# Altium PCB Din24x.PcbDoc
Units mil, origin at the board's own origin, x right, y up, seen from the top; angles counter-clockwise.
Board outline 2913.39 x 1181.1 mil, 2 copper layers (Top Layer, Bottom Layer); 21 components, 34 nets, 164 pads, 47 vias.
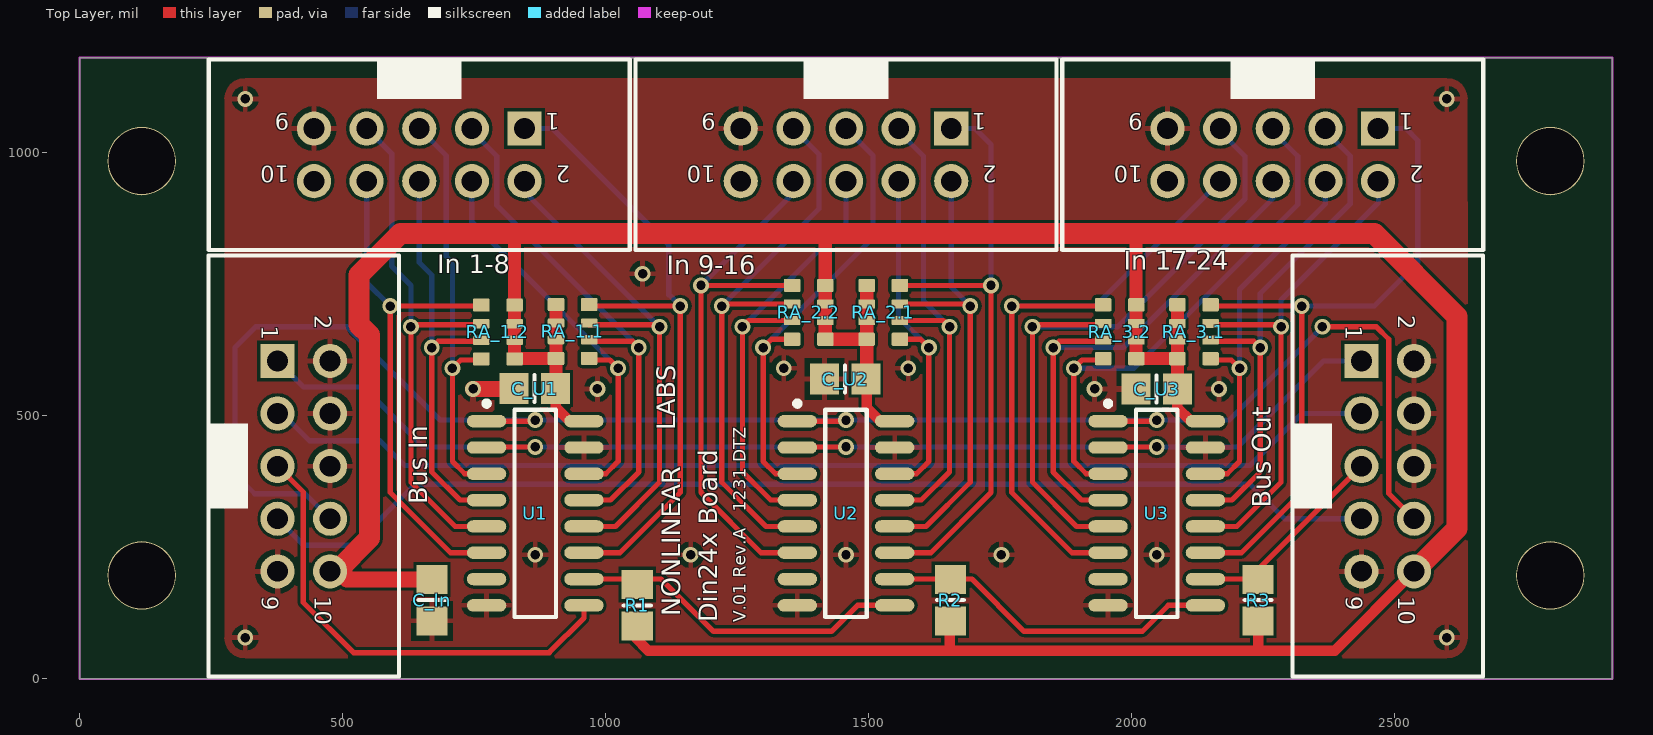
[diagram p0: Top Layer view]
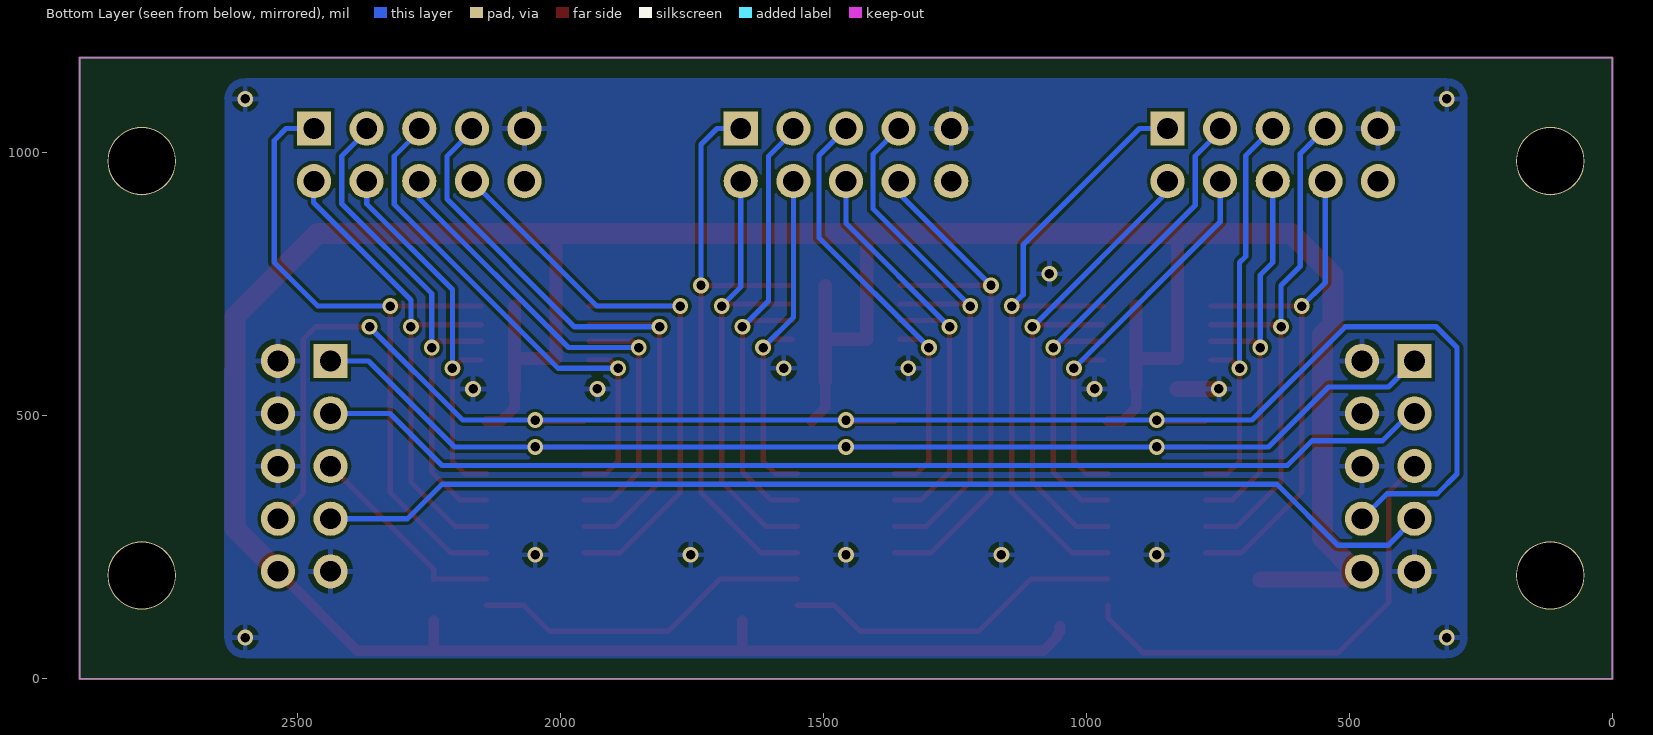
[diagram p1: Bottom Layer view, seen from below]

## Layer stack, top to bottom
Top Layer: signal copper 1.4
Dielectric: dielectric 12.6, FR-4, Dk 4.8
Bottom Layer: signal copper 1.4

## Board outline
0,0 0,1181.1 2913.39,1181.1 2913.39,0 1968.5,0

## Design rules (kind name [scope] priority, off if disabled: settings)
Clearance [All] p1: gap=6
ComponentClearance [All] p1 off: gap=10 collisioncheckmode=3 verticalgap=10 showdistances=FALSE
HoleSize [All] p1: absolutevalues=TRUE maxlimit=196.85 minlimit=1 maxpercent=80.000 minpercent=20.000
MinimumSolderMaskSliver [All] p1: minsoldermaskwidth=6
PolygonConnect [All] p1: connectstyle=Relief reliefconductorwidth=10 reliefentries=4 polygonreliefangle="90 Angle" airgapwidth=10
RoutingVias [All] p1: holewidth=28 width=50 viastyle="Through Hole" minholewidth=28 minwidth=50 maxholewidth=28 maxwidth=50
SilkToSilkClearance [All] p1 off: silktosilkclearance=6
SilkscreenOverComponentPads [All] p1 off: minsilkscreentomaskgap=6
SolderMaskExpansion [All] p1: expansion=4
Width [All] p1: maxlimit=78.74 minlimit=6 preferedwidth=10
23 further rules are at their usual default settings.

## Components (designator, comment, footprint, x,y, rotation, side; value= is the part's Value field where it differs from the comment)
"Bus In" "10 pol" 918510x324 426.18,404.53 r270 top
"Bus Out" "10 pol" 918510x324 2486.22,404.53 r270 top
C_In "Cap Semi" 6-0805_M 670,150 r90 top
C_U1 "Cap Semi" 6-0805_M 865,552 r0 top
C_U2 "Cap Semi" 6-0805_M 1455,570 r0 top
C_U3 "Cap Semi" 6-0805_M 2047,551 r0 top
"In 1-8" "10 pol" 918510x324 645.67,996.06 r180 top
"In 9-16" "10 pol" 918510x324 1456.69,996.06 r180 top
"In 17-24" "10 pol" 918510x324 2267.72,996.06 r180 top
R1 "Res2" 6-0805_M 1060,140 r270 top
R2 "Res2" 6-0805_M 1655,150 r270 top
R3 "Res2" 6-0805_M 2240,150 r270 top
RA_1.1 "EXB38" EXB38 937.01,660.48 r90 top
RA_1.2 "EXB38" EXB38 795.28,659.48 r270 top
RA_2.1 "EXB38" EXB38 1527.56,696.85 r90 top
RA_2.2 "EXB38" EXB38 1385.83,696.85 r270 top
RA_3.1 "EXB38" EXB38 2118,660 r90 top
RA_3.2 "EXB38" EXB38 1977,660 r270 top
U1 "SN74HC165D" D016_L 866.14,314.96 r0 top
U2 "SN74HC165D" D016_L 1456.69,314.96 r0 top
U3 "SN74HC165D" D016_L 2047.24,314.96 r0 top

## Footprints (in the part's own frame and the unit in brackets; to place one, negate y for a bottom-side part, rotate by r counter-clockwise, add the part's x,y. Pads: shape width x height; smd on the part's side, far side on the other; paste and mask are expansions set on the pad)
6-0805_M [mm] "Chip Resistor, Body 2.0x1.2mm, IPC Low Density"
  rect 1.4x1.5 smd: 1(-1,0) 2(1,0)
  silkscreen extent 0,-0.65 0,0.65, body extent -1.07,-0.7 1.07,0.7, height 0.7
918510x324 [mm] "Connector; IDC, Low Profile Male Header, Thru-Hole; 10 Position; Vertical; Pitch 2.54 mm; Body 20.32 x 9.2 x 9.45 mm (LxWxH)"
  rect 1.65x1.65 hole 1: 1(-5.08,-1.27)
  round 1.65 hole 1: 2(-5.08,1.27) 3(-2.54,-1.27) 4(-2.54,1.27) 5(0,-1.27) 6(0,1.27) 7(2.54,-1.27) 8(2.54,1.27) 9(5.08,-1.27) 10(5.08,1.27)
  silkscreen extent -10.16,-4.6 10.16,4.6
D016_L [mm] "SOIC, 16-Leads, Body 9.9x3.9mm, Pitch 1.27mm, IPC High Density"
  oval 1.9x0.6 smd: 1(-2.35,4.445) 2(-2.35,3.175) 3(-2.35,1.905) 4(-2.35,0.635) 5(-2.35,-0.635) 6(-2.35,-1.905) 7(-2.35,-3.175) 8(-2.35,-4.445) 9(2.35,-4.445) 10(2.35,-3.175) 11(2.35,-1.905) 12(2.35,-0.635) 13(2.35,0.635) 14(2.35,1.905) 15(2.35,3.175) 16(2.35,4.445)
  silkscreen extent -2.47,-5 1,5.42, body extent -1.95,-4.95 1.95,4.95, height 1.75
EXB38 [mm]
  rrect20% 0.64x0.8 smd: 1(-1.3,-0.8) 4(1.3,-0.8) 5(1.3,0.8) 8(-1.3,0.8)
  rrect20% 0.44x0.8 smd: 2(-0.4,-0.8) 3(0.4,-0.8) 6(0.4,0.8) 7(-0.4,0.8)

## Part data
"Bus In" "Bus Out" "In 1-8" "In 9-16" "In 17-24": library part "09 18 510 6324", "Flat Cable Connector (IDC), Low-Profile Male Header, Straight Solder Pin, 10 Contacts, Performance Level 2"
C_In C_U1 C_U2 C_U3: "Capacitor (Semiconductor SIM Model)"
R1 R2 R3: "Resistor"
RA_1.1 RA_1.2 RA_2.1 RA_2.2 RA_3.1 RA_3.2: library part "4 Resistors Parallel"
U1 U2 U3: "8-Bit Parallel-Load Shift Register"

## Free pads (board coordinates)
  round 129.92 hole 125.98: ""(118.11,196.85) ""(118.11,984.25) ""(2795.28,196.85) ""(2795.28,984.25)

## Via types
v1: diameter 30, hole 18, Top Layer to Bottom Layer, 47 vias

## Nets (pads, with @x,y where several pads share a name; then routed paths per layer and width w, separated by ;. In a path a pad name is that pad's centre, name@x,y a point inside that pad or via, vN(x,y) a via of type N, cw(c..) or ccw(c..) an arc to the next point about the centre after c; other vN are vias at no path point)
CL: "Bus In.1" "Bus Out.1" U1.2 U2.2 U3.2 | length 2470.2
  Top Layer w10: U1.2@774.61,440.94 v1(866.14,440.94) ; U2.2@1365.16,440.94 v1(1456.69,440.94) ; U3.2@1955.71,440.94 v1(2047.24,440.94)
  Bottom Layer w10: 376.18,604.53 425.59,555.12 539.37,555.12 653.54,440.94 v1(866.14,440.94) v1(1456.69,440.94) v1(2047.24,440.94) 2200.79,440.94 2364.37,604.53 2436.22,604.53
GND: "Bus In.2" "Bus In.4" "Bus In.6" "Bus In.9" "Bus Out.2" "Bus Out.4" "Bus Out.6" "Bus Out.9" "In 1-8.9" "In 9-16.9" "In 17-24.9" C_In.1 C_U1.1 C_U2.1 C_U3.1 U1.8 U1.15 U2.8 U2.15 U3.8 U3.15 | length 78.7
  Top Layer w30: v1(748.03,551.18) C_U1.1@826.77,551.18
  other v1: 314.96,78.74 2598.43,78.74 866.14,236.22 1161.42,236.22 1456.69,236.22 1751.97,236.22 2047.24,236.22 984.25,551.18 1929.13,551.18 2165.35,551.18 1338.58,590.55 1574.8,590.55 1070,770 314.96,1102.36 2598.43,1102.36
ID: "Bus In.5" U1.9 | length 903.5
  Top Layer w10: 376.18,404.53 425.2,355.51 425.2,145.67 520.87,50 892.52,50 958.66,116.14 U1.9
ID_1: R1.1 U1.10 U2.9 | length 650.8
  Top Layer w10: U1.10 1105.32,189.96 ; 1106.3,188.98 1204.72,90.55 1429.13,90.55 1478.54,139.96 U2.9
ID_2: R2.1 U2.10 U3.9 | length 652.2
  Top Layer w10: U2.10 1695.87,189.96 1795.28,90.55 2019.68,90.55 2069.09,139.96 U3.9
ID_3: "Bus Out.5" R3.1 U3.10 | length 396.9
  Top Layer w10: U3.10 2239.41,189.96 R3.1 2240,208.31 2436.22,404.53
IG: "Bus In.8" "Bus Out.8" U1.1 U2.1 U3.1 | length 3454.2
  Top Layer w10: U1.1 v1@863.98,489.96 ; U2.1 v1@1454.53,489.96 ; U3.1 v1@2045.08,489.96 ; v1(2362.2,669.29) 2464.57,669.29 2488.19,645.67 2488.19,352.56 2536.22,304.53
  Bottom Layer w10: 476.18,304.53 428.7,352.01 333.03,352.01 295.28,389.76 295.28,629.92 334.65,669.29 507.87,669.29 685.04,492.13 v1(866.14,492.13) v1(1456.69,492.13) v1(2047.24,492.13) 2185.04,492.13 v1(2362.2,669.29)
IN_1.1: "In 1-8.1" RA_1.1.4 U1.11 | length 1249.2
  Top Layer w10: U1.11 1027.36,239.96 1141.73,354.33 v1(1141.73,708.66) RA_1.1.4@968.5,708.66
  Bottom Layer w10: 845.67,1046.06 898.82,1046.06 1120,824.88 1120,730.39 v1(1141.73,708.66)
IN_1.2: "In 1-8.2" RA_1.1.3 U1.12 | length 972.3
  Top Layer w10: U1.12 1018.31,289.96 1102.36,374.02 v1(1102.36,669.29) 1098.43,673.23 RA_1.1.3@968.5,673.23
  Bottom Layer w10: 845.67,925.98 v1(1102.36,669.29)
IN_1.3: "In 1-8.3" RA_1.1.2 U1.13 | length 1004.7
  Top Layer w10: U1.13 1009.25,339.96 1062.99,393.7 v1(1062.99,629.92) 1051.18,641.73 RA_1.1.2@968.5,641.73
  Bottom Layer w10: 745.67,1041.02 793.15,993.54 793.15,899.76 v1(1062.99,629.92)
IN_1.4: "In 1-8.4" RA_1.1.1 U1.14 | length 784.1
  Top Layer w10: U1.14 1000.2,389.96 1023.62,413.39 v1(1023.62,590.55) 1007.87,606.3 RA_1.1.1@968.5,606.3
  Bottom Layer w10: 745.67,946.06 745.67,868.5 v1(1023.62,590.55)
IN_1.5: "In 1-8.5" RA_1.2.4 U1.3 | length 795.1
  Top Layer w10: RA_1.2.4@763.78,606.3 724.41,606.3 v1(708.66,590.55) 708.66,413.39 732.09,389.96 U1.3
  Bottom Layer w10: 645.67,1046.06 696.85,994.88 696.85,803.15 708.66,791.34 v1(708.66,590.55)
IN_1.6: "In 1-8.6" RA_1.2.3 U1.4 | length 788.1
  Top Layer w10: RA_1.2.3@763.78,641.73 681.1,641.73 v1(669.29,629.92) 669.29,393.7 723.03,339.96 U1.4
  Bottom Layer w10: 645.67,946.06 645.67,791.34 669.29,767.72 v1(669.29,629.92)
IN_1.7: "In 1-8.7" RA_1.2.2 U1.5 | length 1015.4
  Top Layer w10: v1(629.92,669.29) 629.92,374.02 713.98,289.96 U1.5 ; v1@633.86,673.23 RA_1.2.2@763.78,673.23
  Bottom Layer w10: 545.67,1046.06 593.15,998.58 593.15,784.8 629.92,748.03 v1(629.92,669.29)
IN_1.8: "In 1-8.8" RA_1.2.1 U1.6 | length 1014
  Top Layer w10: RA_1.2.1@763.78,708.66 v1(590.55,708.66) 590.55,354.33 704.92,239.96 U1.6
  Bottom Layer w10: 545.67,946.06 545.67,753.54 v1(590.55,708.66)
IN_2.1: "In 9-16.1" RA_2.1.4 U2.11 | length 1153.2
  Top Layer w10: U2.11 1617.91,239.96 1732.28,354.33 v1(1732.28,748.03) RA_2.1.4
  Bottom Layer w10: 1656.69,1046.06 1701.97,1046.06 1732.28,1015.75 v1(1732.28,748.03)
IN_2.2: "In 9-16.2" RA_2.1.3 U2.12 | length 901.1
  Top Layer w10: U2.12 1608.86,289.96 1692.91,374.02 v1(1692.91,708.66) 1688.98,712.6 RA_2.1.3
  Bottom Layer w10: 1656.69,946.06 1656.69,744.88 v1(1692.91,708.66)
IN_2.3: "In 9-16.3" RA_2.1.2 U2.13 | length 913.4
  Top Layer w10: U2.13 1599.8,339.96 1653.54,393.7 v1(1653.54,669.29) 1641.73,681.1 RA_2.1.2
  Bottom Layer w10: 1556.69,1041.02 1604.17,993.54 1604.17,718.66 v1(1653.54,669.29)
IN_2.4: "In 9-16.4" RA_2.1.1 U2.14 | length 692.8
  Top Layer w10: U2.14 1590.75,389.96 1614.17,413.39 v1(1614.17,629.92) 1598.43,645.67 RA_2.1.1
  Bottom Layer w10: 1556.69,946.06 1556.69,687.4 v1(1614.17,629.92)
IN_2.5: "In 9-16.5" RA_2.2.4 U2.3 | length 876.6
  Top Layer w10: RA_2.2.4 1314.96,645.67 v1(1299.21,629.92) 1299.21,413.39 1322.64,389.96 U2.3
  Bottom Layer w10: v1(1299.21,629.92) 1507.87,838.58 1507.87,994.88 1456.69,1046.06
IN_2.6: "In 9-16.6" RA_2.2.3 U2.4 | length 859.9
  Top Layer w10: RA_2.2.3 1271.65,681.1 v1(1259.84,669.29) 1259.84,393.7 1313.58,339.96 U2.4
  Bottom Layer w10: v1(1259.84,669.29) 1456.69,866.14 1456.69,946.06
IN_2.7: "In 9-16.7" RA_2.2.2 U2.5 | length 1082.9
  Top Layer w10: RA_2.2.2 1224.41,712.6 v1(1220.47,708.66) 1220.47,374.02 1304.53,289.96 U2.5
  Bottom Layer w10: v1(1220.47,708.66) 1405.51,893.7 1405.51,997.24 1356.69,1046.06
IN_2.8: "In 9-16.8" RA_2.2.1 U2.6 | length 1068.1
  Top Layer w10: RA_2.2.1 v1(1181.1,748.03) 1181.1,354.33 1295.47,239.96 U2.6
  Bottom Layer w10: v1(1181.1,748.03) 1356.69,923.62 1356.69,946.06
IN_3.1: "In 17-24.1" RA_3.1.4 U3.11 | length 1329.9
  Top Layer w10: U3.11 2208.46,239.96 2322.83,354.33 v1(2322.83,708.66) RA_3.1.4@2149.61,708.66
  Bottom Layer w10: v1(2322.83,708.66) 2460.63,708.66 2543.31,791.34 2543.31,1023.62 2520.87,1046.06 2467.72,1046.06
IN_3.2: "In 17-24.2" RA_3.1.3 U3.12 | length 962.7
  Top Layer w10: U3.12 2199.41,289.96 2283.46,374.02 v1(2283.46,669.29) 2279.53,673.23 RA_3.1.3@2149.61,673.23
  Bottom Layer w10: v1(2283.46,669.29) 2283.46,720.47 2468.5,905.51 2468.5,946.06
IN_3.3: "In 17-24.3" RA_3.1.2 U3.13 | length 968.9
  Top Layer w10: U3.13 2190.35,339.96 2244.09,393.7 v1(2244.09,629.92) 2232.28,641.73 RA_3.1.2@2149.61,641.73
  Bottom Layer w10: v1(2244.09,629.92) 2244.09,732.28 2415.2,903.39 2415.2,993.54 2367.72,1041.02 2367.72,1046.06
IN_3.4: "In 17-24.4" RA_3.1.1 U3.14 | length 736.5
  Top Layer w10: U3.14 2181.3,389.96 2204.72,413.39 v1(2204.72,590.55) 2188.98,606.3 RA_3.1.1@2149.61,606.3
  Bottom Layer w10: v1(2204.72,590.55) 2204.72,740.16 2367.72,903.15 2367.72,946.06
IN_3.5: "In 17-24.5" RA_3.2.4 U3.3 | length 1034.6
  Top Layer w10: v1@1889.76,598.43 v1(1889.76,590.55) ; RA_3.2.4@1944.88,606.3 1905.51,606.3 v1(1889.76,590.55) ; U3.3 1913.19,389.96 1889.76,413.39 v1(1889.76,590.55)
  Bottom Layer w10: v1(1889.76,590.55) 2003.94,590.55 2315.2,901.81 2315.2,993.54 2267.72,1041.02
IN_3.6: "In 17-24.6" RA_3.2.3 U3.4 | length 1035.5
  Top Layer w10: v1@1850.39,635.83 v1(1850.39,629.92) ; RA_3.2.3@1944.88,641.73 1862.2,641.73 v1(1850.39,629.92) ; U3.4 1904.13,339.96 1850.39,393.7 v1(1850.39,629.92)
  Bottom Layer w10: v1(1850.39,629.92) 1984.25,629.92 2267.72,913.39 2267.72,946.06
IN_3.7: "In 17-24.7" RA_3.2.2 U3.5 | length 1262.7
  Top Layer w10: RA_3.2.2@1944.88,673.23 1814.96,673.23 v1(1811.02,669.29) 1811.02,374.02 1895.08,289.96 U3.5
  Bottom Layer w10: v1(1811.02,669.29) 1972.44,669.29 2215.2,912.05 2215.2,993.54 2167.72,1041.02
IN_3.8: "In 17-24.8" RA_3.2.1 U3.6 | length 1252.4
  Top Layer w10: RA_3.2.1@1944.88,708.66 v1(1771.65,708.66) 1771.65,354.33 1886.02,239.96 U3.6
  Bottom Layer w10: v1(1771.65,708.66) 1930.31,708.66 2167.72,946.06
OD: "Bus In.3" "Bus Out.3" | length 2142.1
  Bottom Layer w10: 376.18,504.53 385.24,504.53 437.01,452.76 570.87,452.76 618.11,405.51 2224.41,405.51 2323.43,504.53 2436.22,504.53
OS: "Bus In.7" "Bus Out.7" | length 2156.3
  Bottom Layer w10: 376.18,304.53 426.77,253.94 521.65,253.94 637.8,370.08 2224.41,370.08 2289.96,304.53 2436.22,304.53
VCC: "Bus In.10" "Bus Out.10" C_In.2 C_U1.2 C_U2.2 C_U3.2 R1.2 R2.2 R3.2 RA_1.1.5 RA_1.1.6 RA_1.1.7 RA_1.1.8 RA_1.2.5 RA_1.2.6 RA_1.2.7 RA_1.2.8 RA_2.1.5 RA_2.1.6 RA_2.1.7 RA_2.1.8 RA_2.2.5 RA_2.2.6 RA_2.2.7 RA_2.2.8 RA_3.1.5 RA_3.1.6 RA_3.1.7 RA_3.1.8 RA_3.2.5 RA_3.2.6 RA_3.2.7 RA_3.2.8 U1.16 U2.16 U3.16 | length 6886.5
  Top Layer w20: C_U1.2@905.51,555.12 905.51,515.75 931.3,489.96 U1.16 ; R1.2@1050,100.63 1050,90 1055,85 1055,80 1081.26,53.74 2240,53.74 ; C_U2.2@1496.06,566.93 1496.06,515.75 U2.16@1521.85,489.96 ; 1653.54,59.06 R2.2@1653.54,110.63 ; C_U3.2@2086.61,551.18 2086.61,515.75 2112.4,489.96 U3.16 ; R3.2 2240,53.74 ; 2536.22,204.53 2385.43,53.74 2240,53.74
  Top Layer w25: 826.77,846.46 826.77,609 RA_1.1.8@905.51,609 ; C_U1.2@905.51,555.12 RA_1.1.5@905.51,708.66 ; 1417.32,842.52 RA_2.2.8 RA_2.2.7 RA_2.2.6 RA_2.2.5 RA_2.1.8 ; C_U2.2@1496.06,566.93 RA_2.1.8 ; RA_2.1.5 RA_2.1.6 RA_2.1.7 RA_2.1.8 ; 2007.87,838.58 2007.87,609 RA_3.1.8@2086.61,609 ; C_U3.2@2086.61,551.18 RA_3.1.5@2086.61,708.66
  Top Layer w30: 476.18,204.53 487.99,204.53 ; 503.74,204.53 503.74,193.11 507.87,188.98 C_In.2@669.29,188.98
  Top Layer w40: 487.99,204.53 551.18,267.72 551.18,653.54 531.5,673.23 531.5,767.72 610.24,846.46 826.77,846.46 2460.63,846.46 2618.11,688.98 2618.11,286.42 2536.22,204.53
  Bottom Layer w10: 476.18,204.53 495.67,185.04
pads on no net: "In 1-8.10" "In 9-16.10" "In 17-24.10" U1.7 U2.7 U3.7

## Polygon pours and split planes (outlines as drawn)
GND on Bottom Layer "GND" (solid, remove dead copper, pour order 4): 275.59,1102.36 cw(c314.96,1102.36) 314.96,1141.73 2598.43,1141.73 cw(c2598.43,1102.36) 2637.8,1102.36 2637.8,78.74 cw(c2598.43,78.74) 2598.43,39.37 314.96,39.37 cw(c314.96,78.74) 275.59,78.74
GND on Top Layer "GND" (solid, remove dead copper, pour order 6): 275.59,1102.36 cw(c314.96,1102.36) 314.96,1141.73 2598.43,1141.73 cw(c2598.43,1102.36) 2637.8,1102.36 2637.8,78.74 cw(c2598.43,78.74) 2598.43,39.37 314.96,39.37 cw(c314.96,78.74) 275.59,78.74

## Keep-outs
Keep-Out Layer:
  lines w3.94: 0,0 0,1181.1 2913.39,1181.1 2913.39,0 0,0

## Silkscreen, mask and mechanical layers (free items; w line width, h text height)
Top Overlay:
  text "LABS" at 1143.43,472.76 h60 r90
  text "NONLINEAR" at 1152.99,119.41 h60 r90
  text "Din24x Board" at 1223.43,107.76 h60 r90
  text "V.01 Rev.A   1231 DTZ" at 1273.43,107.76 h40 r90

## Text inside footprints (layer, text, board x,y; h text height)
"Bus In": Top Overlay "2" at 446.65,691.13 h31.5 r270; Top Overlay "1" at 346.65,671.45 h31.5 r270; Top Overlay "9" at 346.65,157.28 h31.5 r270; Top Overlay "10" at 446.65,157.28 h31.5 r270
"Bus Out": Top Overlay "2" at 2506.69,691.13 h31.5 r270; Top Overlay "1" at 2406.69,671.45 h31.5 r270; Top Overlay "9" at 2406.69,157.28 h31.5 r270; Top Overlay "10" at 2506.69,157.28 h31.5 r270
"In 1-8": Top Overlay "1" at 912.59,1075.59 h31.5 r180; Top Overlay "2" at 932.27,975.59 h31.5 r180; Top Overlay "9" at 398.43,1075.59 h31.5 r180; Top Overlay "10" at 398.43,975.59 h31.5 r180
"In 9-16": Top Overlay "1" at 1723.61,1075.59 h31.5 r180; Top Overlay "2" at 1743.3,975.59 h31.5 r180; Top Overlay "9" at 1209.45,1075.59 h31.5 r180; Top Overlay "10" at 1209.45,975.59 h31.5 r180
"In 17-24": Top Overlay "1" at 2534.64,1075.59 h31.5 r180; Top Overlay "2" at 2554.32,975.59 h31.5 r180; Top Overlay "9" at 2020.47,1075.59 h31.5 r180; Top Overlay "10" at 2020.47,975.59 h31.5 r180